# Altium PCB PCB_Full.PcbDoc
Units mil, origin at the board's own origin, x right, y up, seen from the top; angles counter-clockwise.
Board outline 2700 x 2100 mil, 2 copper layers (Top Layer, Bottom Layer), stack 62.8 mil thick; 13 components, 31 nets, 58 pads, 12 vias.
Unrouted connection lines stored in the file: 1.
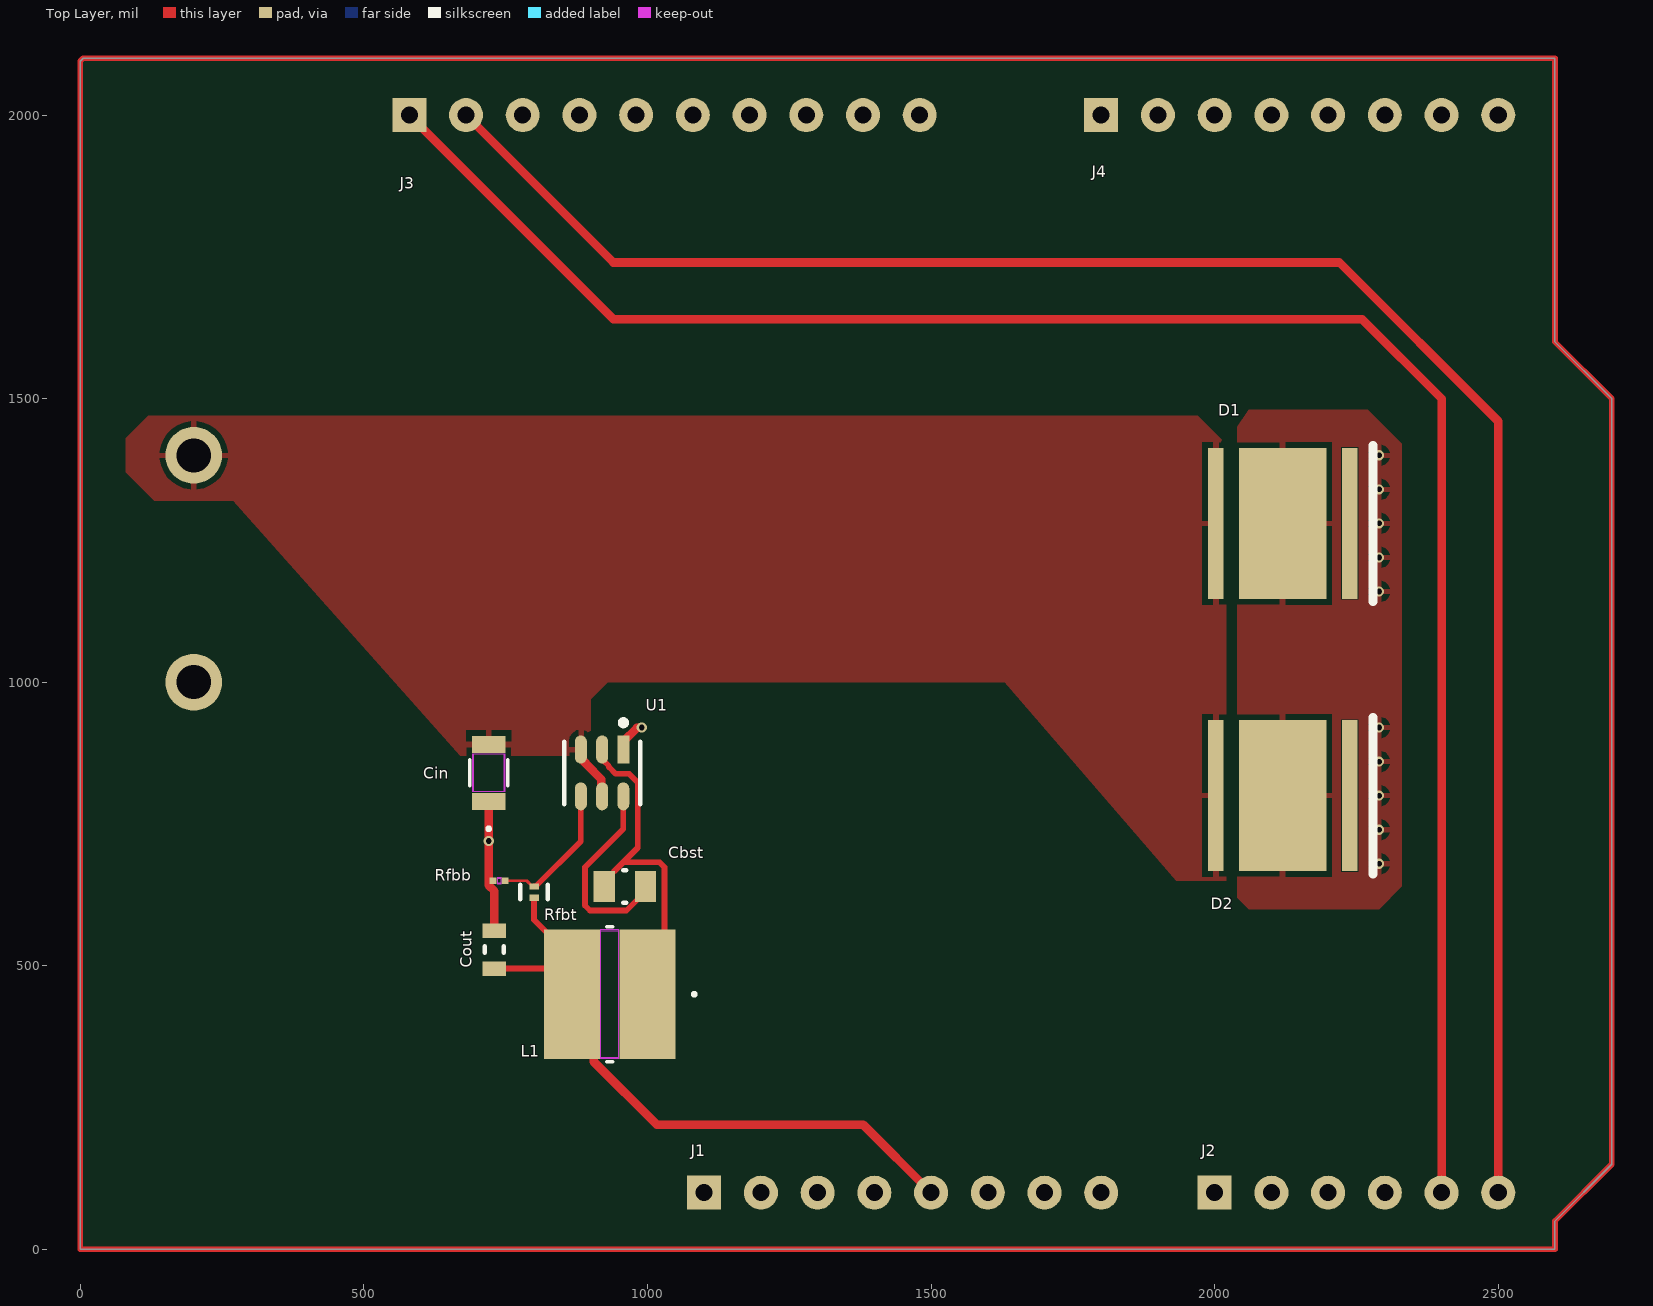
[diagram p0: Top Layer view]
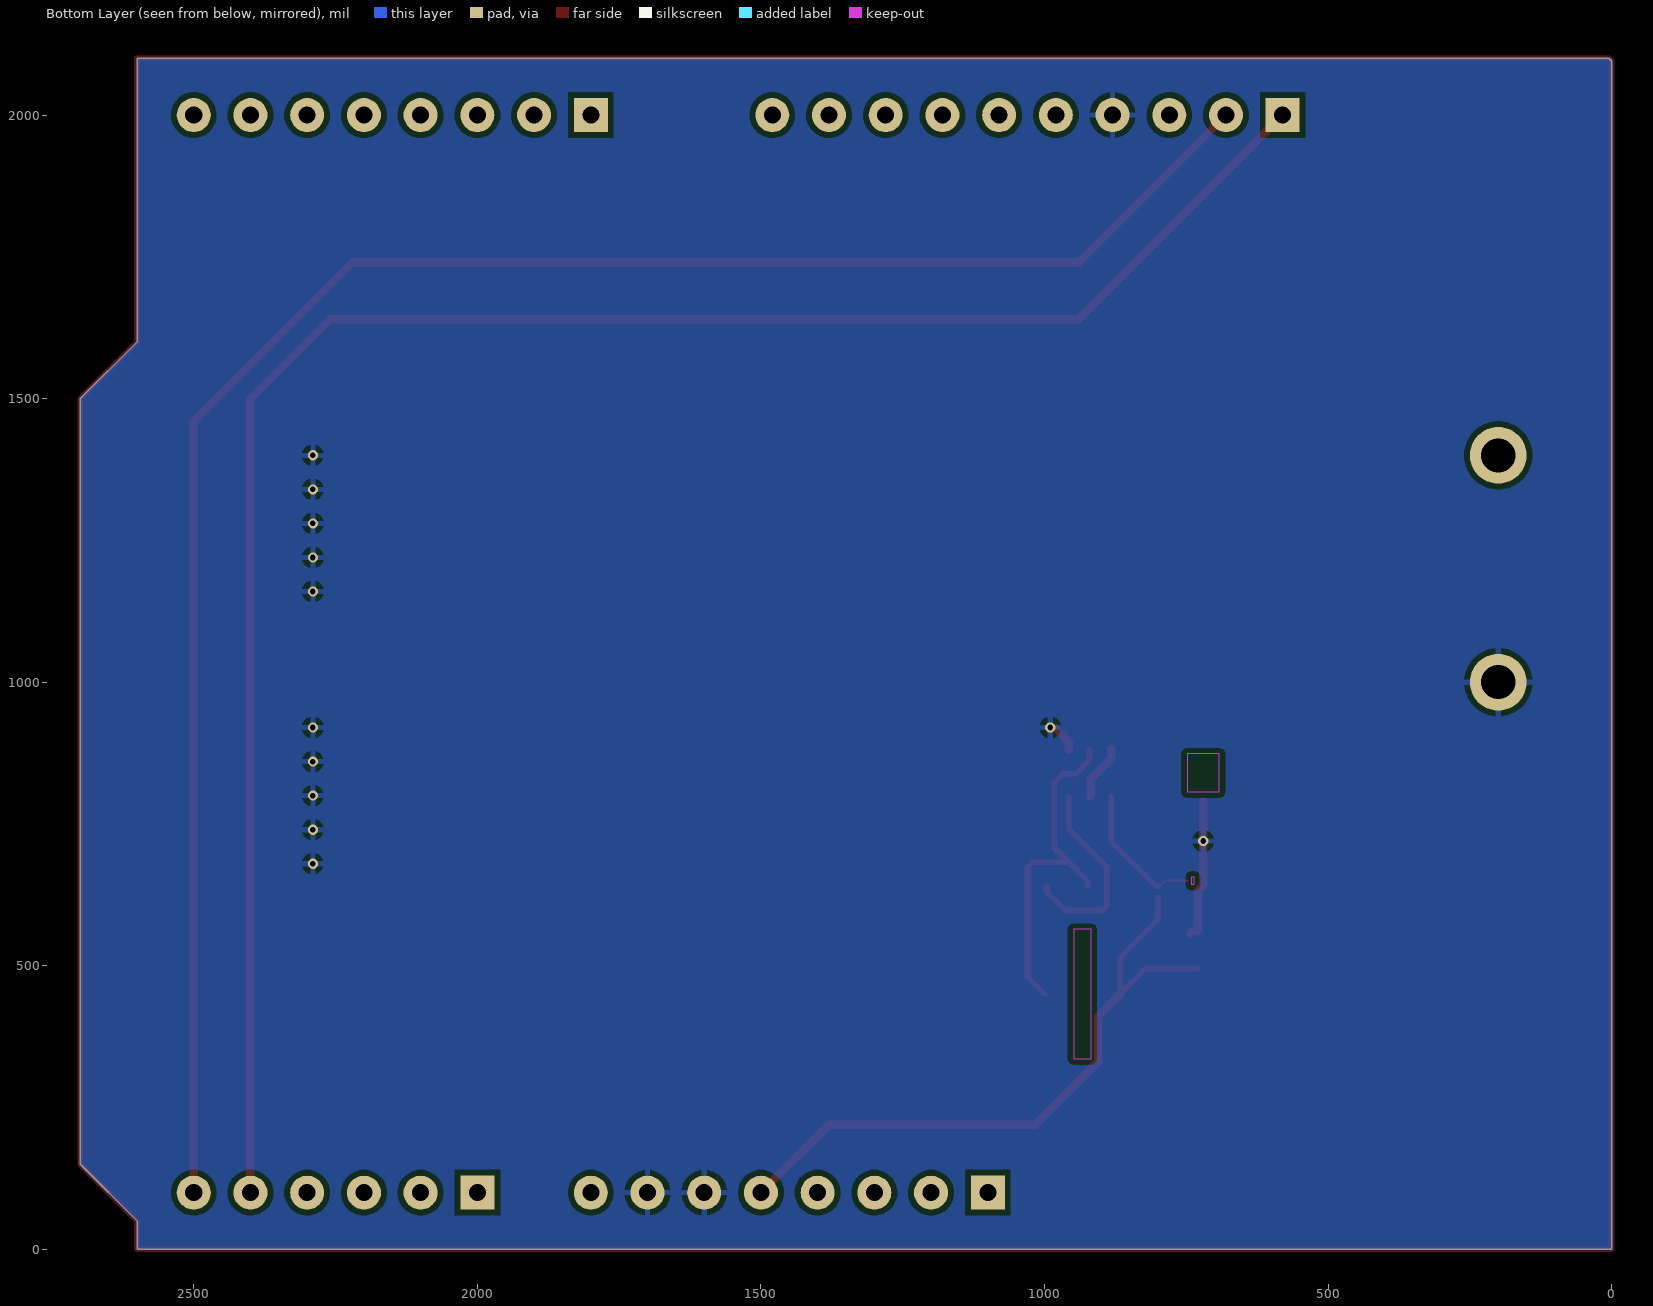
[diagram p1: Bottom Layer view, seen from below]
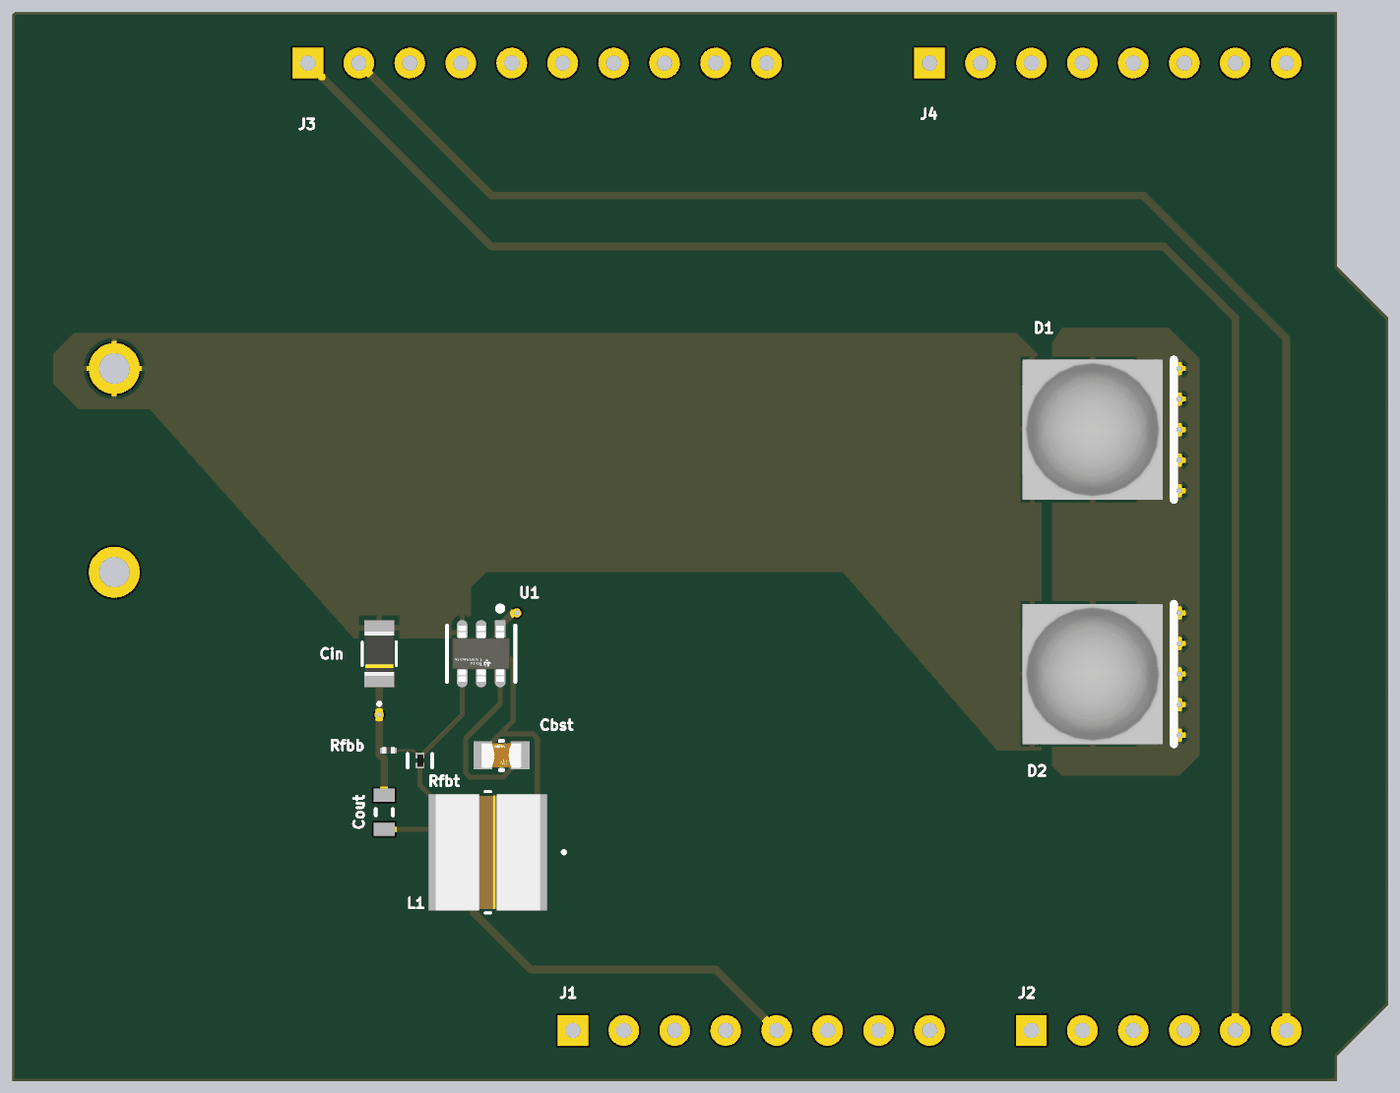
[diagram p2: 3D render of the assembled board from above, using the file's embedded part models]

## Layer stack, top to bottom
Top Solder: solder mask 0.4, Solder Resist, Dk 3.5
Top Layer: signal copper 1.4
Dielectric 1: dielectric 60, FR-4, Dk 4.8
Bottom Layer: signal copper 1.4
Bottom Solder: solder mask 0.4, Solder Resist, Dk 3.5

## Board outline
0,0 0,2095 5,2100 2600,2100 2600,1600 2700,1500 2700,150 2600,50 2600,0

## Design rules (kind name [scope] priority, off if disabled: settings)
Clearance [All] p1: gap=10 ignorepadtopadclearanceinfootprint=TRUE except(1: SMDPad-Fill SMDPad-Poly SMDPad-Region; 5: Arc-Fill Arc-Poly Arc-Region Track-Fill Track-Poly Track-Region; 8: Arc-SMDPad Arc-THPad Track-SMDPad Track-THPad)
PolygonConnect [All] p1: connectstyle=Relief reliefconductorwidth=10 reliefentries=4 polygonreliefangle="90 Angle" airgapwidth=10
RoutingVias [All] p1: holewidth=10 width=18 viastyle="Through Hole" minholewidth=6 minwidth=16 maxholewidth=28 maxwidth=50
SolderMaskExpansion [All] p1: expansion=4 istentingtop=FALSE
Width [All] p1: maxlimit=30 minlimit=5 preferedwidth=15
30 further rules are at their usual default settings.

## Components (designator, comment, footprint, x,y, rotation, side; value= is the part's Value field where it differs from the comment)
Cbst "CC0805KRX7R8BB104" FP-CC0805-0_85-MFG 960,640 r180 top value="100 nF"
Cin "C2012X5R1V106K085AC" CAP_2012_TDK-M 720,840 r90 top
Cout "C1608X5R1A226M080AC" CAPC1608X100X20ML10 730,528.61 r270 top
D1 "MKRAWT-00-0000-0D0HG235H" CREE-MK-R-2_V 2120,1280 r0 top
D2 "MKRAWT-00-0000-0D0HG235H" CREE-MK-R-2_V 2120,800 r0 top
J1 "8 Pin Header" "8 Pin Header-Footprint-1" 1100,100 r0 top
J2 "6 Pin Header" "6 Pin Header-Footprint-1" 2000,100 r0 top
J3 "10 Pin Header" "10 Pin Header-Footprint-1" 580,2000 r0 top
J4 "8 Pin Header" "8 Pin Header-Footprint-1" 1800,2000 r0 top
L1 "NPI54C3R3MTRF" NPI54C3R3MTRF_NIC 933.25,450 r180 top
Rfbb "RC0201FR-0710KL" YAG_R0201_YAG-L 738.34,650 r0 top
Rfbt "RC0201FR-0756K2L" Yageo_RC0201_MFG 800,629.96 r90 top
U1 "TPS562201DDCR" FP-DDC0006A-IPC_C 920,840 r270 top

## Footprints (in the part's own frame and the unit in brackets; to place one, negate y for a bottom-side part, rotate by r counter-clockwise, add the part's x,y. Pads: shape width x height; smd on the part's side, far side on the other; paste and mask are expansions set on the pad)
"6 Pin Header-Footprint-1" [mil]
  rect 60x60 hole 30: 1(0,0)
  round 60 hole 30: 2(100,0) 3(200,0) 4(300,0) 5(400,0) 6(500,0)
"8 Pin Header-Footprint-1" [mil]
  rect 60x60 hole 30: 1(0,0)
  round 60 hole 30: 2(100,0) 3(200,0) 4(300,0) 5(400,0) 6(500,0) 7(600,0) 8(700,0)
"10 Pin Header-Footprint-1" [mil]
  rect 60x60 hole 30: 1(0,0)
  round 60 hole 30: 2(100,0) 3(200,0) 4(300,0) 5(400,0) 6(500,0) 7(600,0) 8(700,0) 9(800,0) 10(900,0)
CAP_2012_TDK-M [mil]
  rect 30x59 smd paste+0 mask+0: 1(-50.5,0) 2(50.5,0)
  Top Layer keep-out region: -33.5,-26.5 -33.5,26.5 33.5,26.5 33.5,-26.5
  Keep-Out Layer region: -33.5,-28.5 -33.5,28.5 33.5,28.5 33.5,-28.5
  silkscreen extent -101,-34 23,34, body extent -44,-29 44,29, height 49
CAPC1608X100X20ML10 [mm] "Chip Capacitor, 2-Leads, Body 1.70x0.90mm, IPC Low Density"
  rect 0.65x1.05 smd: 1(-0.85,0) 2(0.85,0)
  silkscreen extent -0.15,-0.43 0.15,0.43, body extent -0.85,-0.45 0.85,0.45, height 1
CREE-MK-R-2_V [mm] "SMD, 2-Leads, Body 7x7mm, Thermal Pad 3.9x6.76mm"
  rect 0.7x6.76 smd: 1(-3,0) 2(3,0)
  rect 3.9x6.76 smd: 3(0,0)
  silkscreen extent 4.05,-3.5 4.05,3.5, body extent -3.5,-3.5 3.5,3.5, height 4.1
FP-CC0805-0_85-MFG [mm]
  rect 0.95x1.4 smd paste+0 mask+0: 1(-0.925,0) 2(0.925,0)
  silkscreen extent -0.08,-0.72 0.08,0.72, body extent -1.6,-1.05 1.6,1.05, height 0.25
FP-DDC0006A-IPC_C [mm]
  rect 1.254x0.532 smd paste+0 mask+0: 1(-1.05,0.95)
  rrect100% 1.254x0.532 smd paste+0 mask+0: 2(-1.05,0) 3(-1.05,-0.95) 4(1.05,-0.95) 5(1.05,0) 6(1.05,0.95)
  silkscreen extent -2.37,-1.7 1.4,1.7, body extent -1.78,-1.55 1.78,1.55, height 0.25
NPI54C3R3MTRF_NIC [mil]
  rect 98.78x228 smd paste+0 mask+0: 1(-66.75,0) 2(66.75,0)
  Top Layer keep-out region: -15.36,-112 -15.36,112 15.36,112 15.36,-112
  Keep-Out Layer region: -15.36,-114 -15.36,114 15.36,114 15.36,-114
  silkscreen extent -152,-119 5,119, body extent -102,-114 102,114, height 177
YAG_R0201_YAG-L [mil]
  rect 12x11 smd paste+0 mask+0: 1(-10.5,0) 2(10.5,0)
  Top Layer keep-out region: -2.5,-4.5 -2.5,4.5 2.5,4.5 2.5,-4.5
  Keep-Out Layer region: -2.5,-6.5 -2.5,6.5 2.5,6.5 2.5,-6.5
  body extent -13,-6 13,6, height 10
Yageo_RC0201_MFG [mm]
  rect 0.28x0.43 smd paste+0 mask+0: 1(-0.255,0) 2(0.255,0)
  silkscreen extent -0.33,-0.62 0.33,0.62, body extent -0.5,-0.32 0.5,0.32, height 0.25

## Part data
Cbst: library part CMP-1036-04410-2, "CAP CER 0.1UF 25V X7R 0805", Capacitance="100 nF", Manufacturer=Yageo, Package=CC0805-0.85, Temperature="-30°C to +85°C", Temperature Characteristic=X7R, Temperature Range High=+85°C, Temperature Range Low=-30°C, Tolerance=0.1, Voltage Rating="25 V", Automotive=No, Category=Cap, ComponentLink2Description=Datasheet, ComponentLink2URL=http://www.yageo.com/documents/recent/UPY-GPHC_Y5V_6.3V-to-50V_8.pdf, Device Class L1="Passive Components", Device Class L2=Capacitors, Device Class L3="Ceramic Capacitors", Digikey Description="CAP CER 0.1UF 25V X7R 0805", Footprint Url=http://www.yageo.com/exep/pages/download/literatures/UPY-C_GEN_24.pdf, Height=0.95mm, Ipc Land Pattern Name=CAPC200125X85, Lead Free=Yes, Manufacturer Part Number=CC0805KRX7R8BB104, Material=Ceramic, Mouser Description="Multilayer Ceramic Capacitors MLCC - SMD/SMT 100nF 25V X7R 10%", Octopart=https://octopart.com/cc0805krx7r8bb104-yageo-39467766, RoHS=TRUE
Cin: "10uf", Mfr_Name=TDK
Cout: library part CMP-2000-05441-1, "Chip Capacitor, 22 uF, +/- 20%, 10 V, -55 to 85 degC, 0603 (1608 Metric), RoHS, Tape and Reel", Capacitance=22µF, Manufacturer=TDK, Operating Temperature=-55degC~85degC, Package / Case=0603(1608Metric), Package Description="2-Pin Surface Mount Device, Body 1.6 x 0.8 mm", Package Reference=603, PCN Part Number=MLCCPartNumberChange30/Nov/2012, Ratings=-, Standard Package=1, Temperature Coefficient=X5R, Tolerance=±20%, Voltage - Rated=10V, Applications=GeneralPurpose, Category=Capacitors, Datasheet URL=http://download.siliconexpert.com/pdfs/2015/4/21/15/54/45/779/tdk_/manual/37024850441143360mlcc_commercial_general_en.pdf, Datasheet Version=Mar-15, Design Resources=20WNon-IsolatedBuckLEDDriverUsingPLLNK460KG, Family=CeramicCapacitors, Features=-, Height - Seated (Max)=-, Kits=445-9014-KIT-ND-KITMLCC100PF-22UF060310-50V, Lead Spacing=-, Lead Style=-, Manufacturer URL=http://www.tdk.com/, Mounting Type=SurfaceMount,MLCC, Online Catalog=CSeries,GeneralPurpose, Other Names=445-9077-1, Packaging=CutTape(CT), Product Training Modules=CSeriesGeneralApplicationsSEAT,CCV,andTVCLDesignToolsGuidetoReplacinganElectrolyticCapacitorwithanMLCC, RoHS Information=RoHSCertificate-MLCC, Series=C, Size / Dimension="0.063\"Lx0.031\"W(1.60mmx0.80mm)", Thickness (Max)="0.035\"(0.90mm)"
D1 D2: library part CMP-2100-00977-1, "LED, White, 12 V, 2-Pin SMD, RoHS, Tape and Reel"
J1 J4: library part CMP-002-00071-1, "Arduino 8 Pin Header: 30 mils hole diameter, 60 mils pad diameter, 100 mils pin-to-pin"
J2: library part ARDUINO-6PIN-HEADER-1, "Arduino 6 Pin Header: 30 mils hole diameter, 60 mils pad diameter, 100 mils pin-to-pin"
J3: library part CMP-002-00072-1, "Arduino 10 Pin Header: 30 mils hole diameter, 60 mils pad diameter, 100 mils pin-to-pin"
L1: "No Description Available", Mfr_Name="NIC Components Corp.", RefDes=RefDes, Type=Type
Rfbb: "10k Ohms", Mfr_Name=Yageo
Rfbt: "56.2k Ohms"
U1: library part CMP-04918-000361-1, "IC REG BUCK ADJ 2A TSOT23-6", Case/Package=SOT, Max Input Voltage=17V, Max Operating Temperature=125°C, Max Output Current=2A, Min Input Voltage=4.5V, Min Operating Temperature=-40°C, Output Voltage=7V, Quiescent Current=400uA, Switching Frequency=580kHz, Contact Plating=Tin, Lead Free="Lead Free", Mount="Surface Mount", Number of Outputs=1, Number of Pins=6, Operating Supply Voltage=17V, Output Type=Adjustable, RoHS Compliant=Yes

## Free pads (board coordinates)
  round 100 hole 60: GND(200,1000) PWR(200,1400)

## Via types
v1: diameter 18, hole 10, Top Layer to Bottom Layer, 12 vias

## Nets (pads, with @x,y where several pads share a name; then routed paths per layer and width w, separated by ;. In a path a pad name is that pad's centre, name@x,y a point inside that pad or via, vN(x,y) a via of type N, cw(c..) or ccw(c..) an arc to the next point about the centre after c; other vN are vias at no path point)
3V3: J1.4
+5: Cout.2 J1.5 J1.8 L1.2 Rfbt.1 | length 1177.9
  Top Layer w10: Cout.2 822.11,495.15 L1.2@866.5,450.76 ; Rfbt.1 800,581.11 866.5,514.61 L1.2@866.5,450.76 ; L1.2 L1.2@866.5,450.76
  Top Layer w15: L1.2 905.39,411.11 905.39,330.82 1016.49,219.72 1380.28,219.72 J1.5
+12: Cin.2 D1.1 D2.1 pad.PWR U1.3 U1.5 | length 98.2
  Top Layer w15: U1.3 882.6,865.52 892.02,856.1 892.02,855.54 918.86,828.71 918.86,799.79 U1.5
A0: J2.1
A1: J2.2
A2: J2.3
A3: J2.4
A4: J2.5 J3.1 | length 3427.1
  Top Layer w15: J3.1 940,1640 2260,1640 2400,1500 J2.5
A5: J2.6 J3.2 | length 3403.7
  Top Layer w15: J3.2 940,1740 2220,1740 2500,1460 J2.6
AREF: J3.3
D0: J4.8
D1: J4.7
D2: J4.6
D3: J4.5
D4: J4.4
D5: J4.3
D6: J4.2
D7: J4.1
D8: J3.10
D9: J3.9
D10: J3.8
D11: J3.7
D12: J3.6
D13: J3.5
GND: Cin.1 Cout.1 D1.3 D2.3 J1.6 J1.7 J3.4 pad.GND Rfbb.1 U1.1 | length 303.9
  Top Layer w15: Cin.1 v1(720,720) 720,641.66 730,631.66 Cout.1 737.87,562.08 Cout.1@743.17,556.78 ; U1.1 957.4,895.57 981.26,919.43 989.43,919.43 v1(990,920)
  other v1: 2290,680 2290,740 2290,800 2290,860 2290,920 2290,1160 2290,1220 2290,1280 2290,1340 2290,1400
IOREF: J1.2
N-C: J1.1
NetCbst_1: Cbst.1 U1.6 | length 353.4
  Top Layer w10: U1.6 957.4,741.29 889.88,673.77 889.88,606.23 898.67,597.44 962.72,597.44 996.42,631.14 Cbst.1
NetRfbb_2: Rfbb.2 Rfbt.2 U1.4 | length 246.8
  Top Layer w5: Rfbb.2 787.05,650 Rfbt.2@797.05,640
  Top Layer w10: Rfbt.2@800,640.43 803.39,640.43 882.6,719.65 U1.4
RESET: J1.3
SWOUT: Cbst.2 L1.1 U1.2 | length 618.7
  Top Layer w10: U1.2 920,864.17 931.93,852.24 931.93,850.44 944.03,838.34 967.95,838.34 982.88,823.42 982.88,708.15 957.28,682.56 ; Cbst.2 923.58,648.86 957.28,682.56 ; L1.1 1030.12,480.12 1030.12,673.77 1021.33,682.56 957.28,682.56
pads on no net: D1.2 D2.2
copper on no net: | length 9479.9
  Top Layer w10: 0,0 2600,0 2600,50 2700,150 2700,1500 2600,1600 2600,2100 5,2100 0,2095 0,0

## Polygon pours and split planes (outlines as drawn)
GND on Bottom Layer "GND_L02_P000" (solid, pour order 0): 0,0 2600,0 2600,50 2700,150 2700,1500 2600,1600 2600,2100 0,2100
+12 on Top Layer "+12_L01_P005" (solid, pour order 5): 2020,650 2020,1420 1970,1470 120,1470 80,1430 80,1370 130,1320 270,1320 670,870 900,870 900,970 930,1000 1630,1000 1932.7,650
GND on Top Layer "GND_L01_P002" (solid, pour order 2): 2040,1450 2040,620 2060,600 2290,600 2330,640 2330,1420 2270,1480 2060,1480